# Altium PCB CM5IO_első terv.PcbDoc
Units mm, origin at the board's own origin, x right, y up, seen from the top; angles counter-clockwise.
Board outline 140 x 100 mm, 2 copper layers (F.Cu, B.Cu); 26 components, 347 nets, 730 pads, 4 vias.
Unrouted connection lines stored in the file: 306.
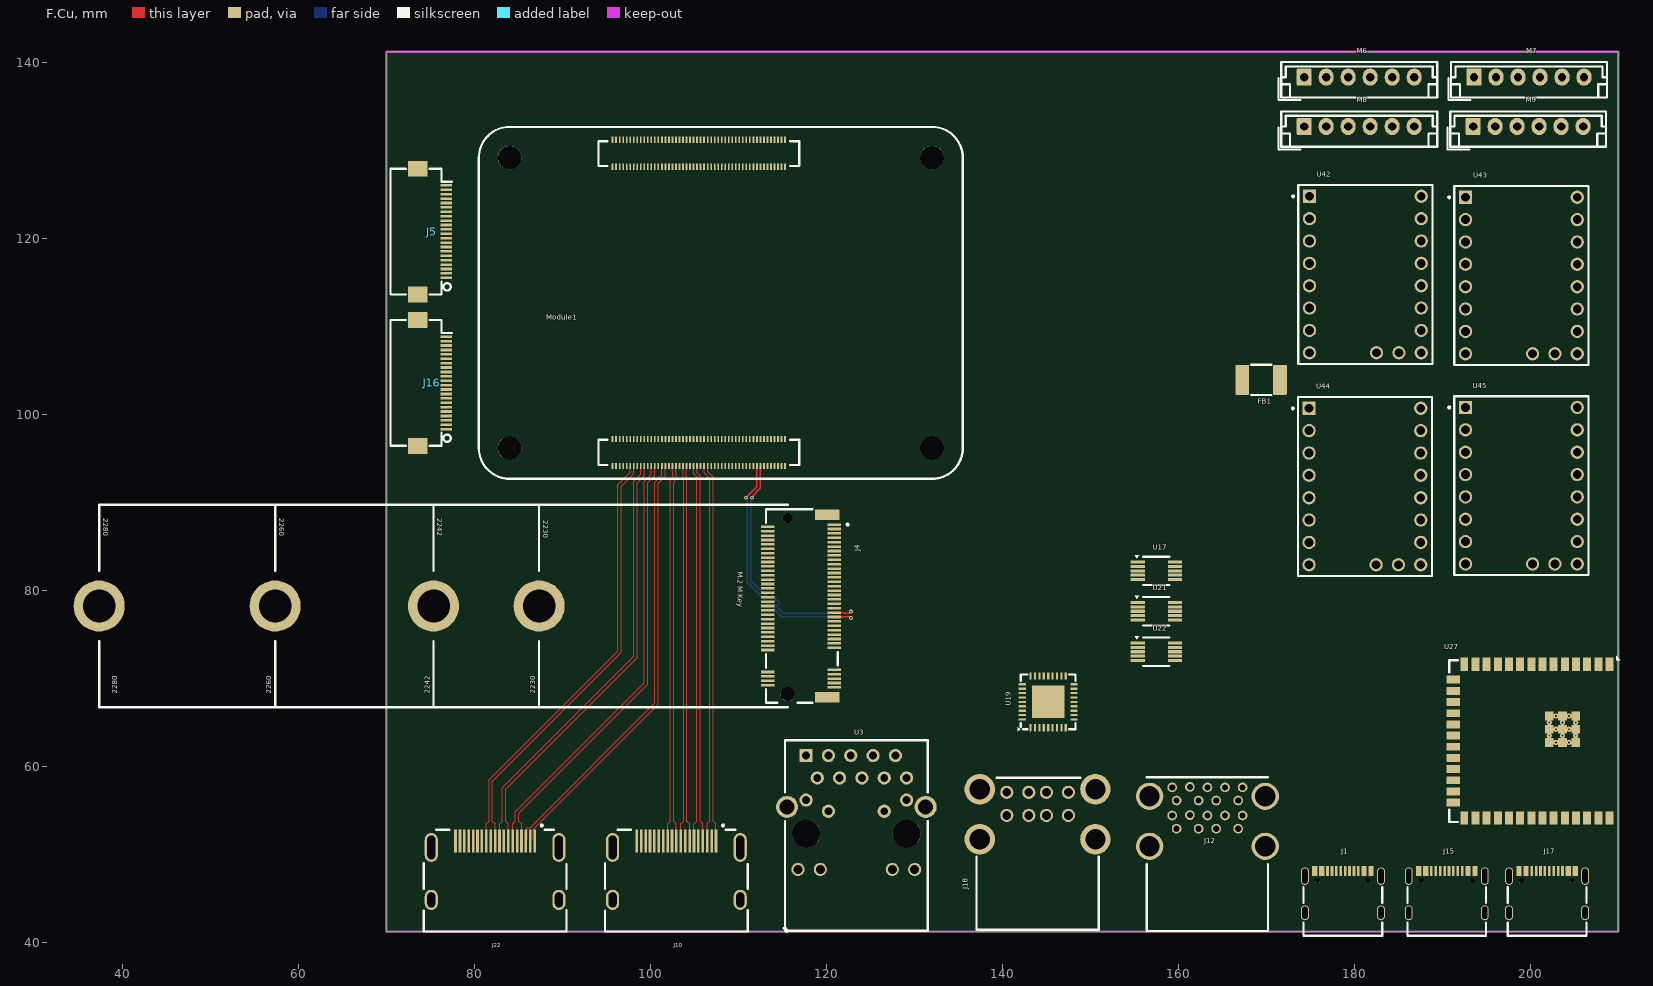
[diagram p0: F.Cu view]
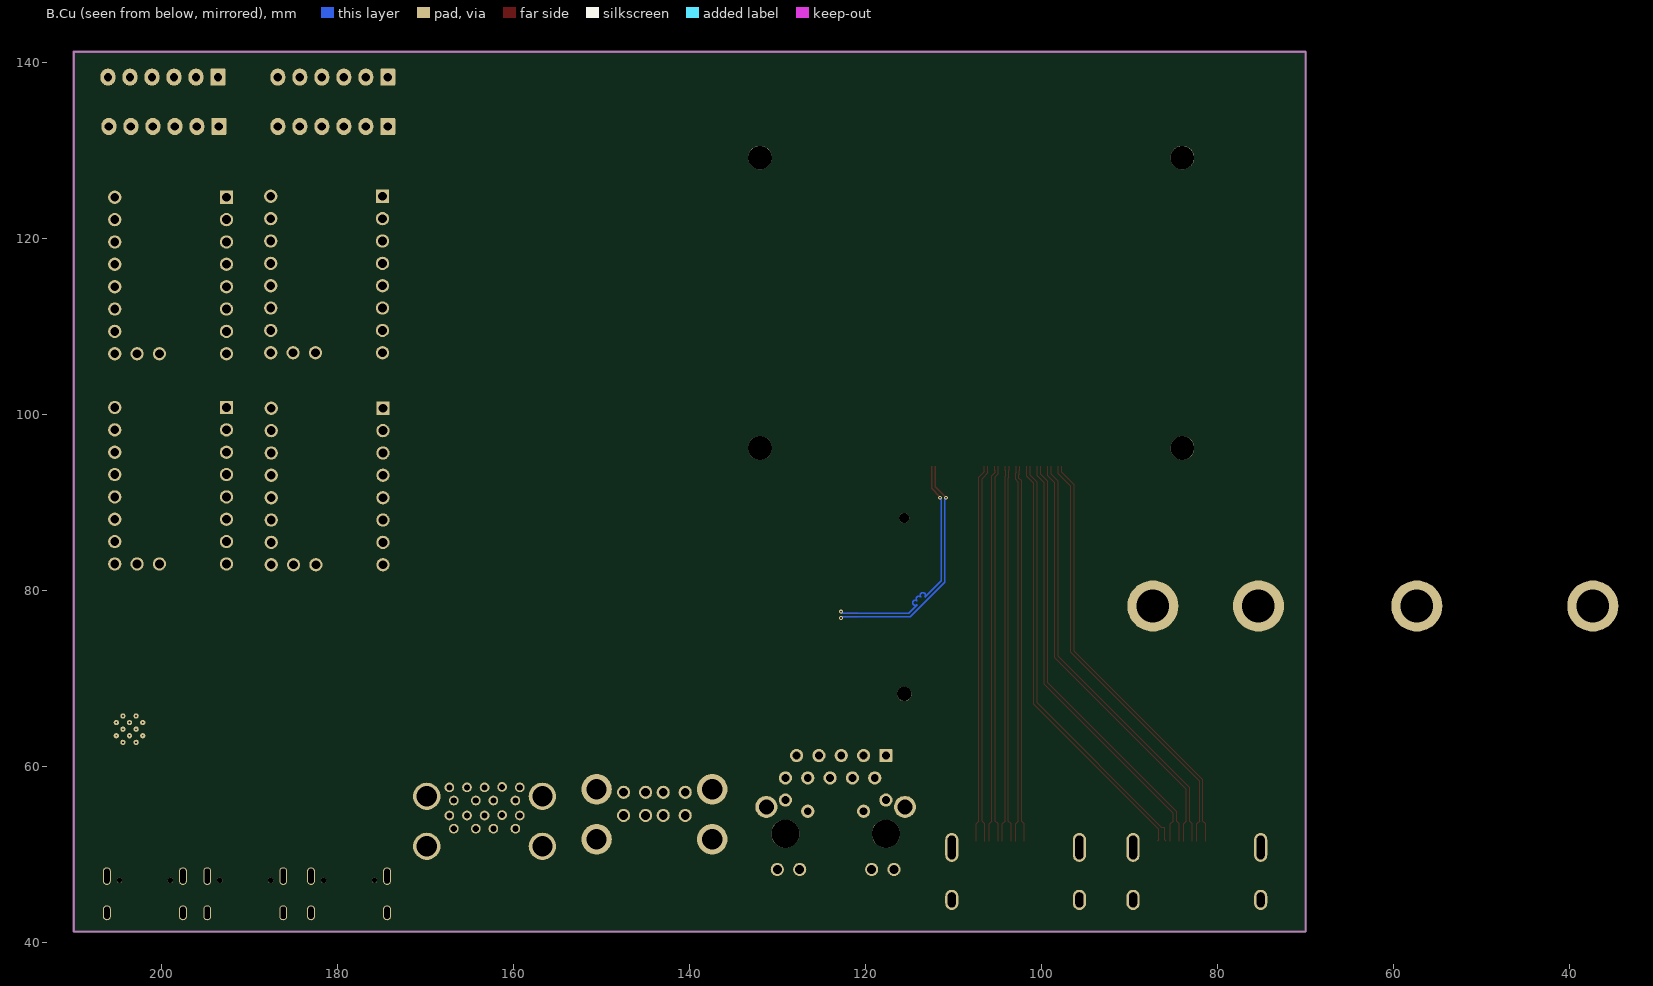
[diagram p1: B.Cu view, seen from below]

## Layer stack, top to bottom
F.Mask: solder mask 0.0102, Solder Resist, Dk 3.5
F.Cu: signal copper 0.0356
Dielectric 1: dielectric 0.32, FR-4, Dk 4.8
B.Cu: signal copper 0.0356
B.Mask: solder mask 0.0102, Solder Resist, Dk 3.5

## Board outline
70,141.25 70,41.25 210,41.25 210,141.25 70,141.25

## Design rules (kind name [scope] priority, off if disabled: settings)
Clearance "Clearence 1,7_PadClass" [InPadClass('Pad Class Clearance 1,7')] p1: gap=1.7 ignorepadtopadclearanceinfootprint=FALSE
MinimumSolderMaskSliver [All] p1: minsoldermaskwidth=0
PolygonConnect [All] p1: connectstyle=Direct reliefconductorwidth=0.254 reliefentries=4 polygonreliefangle="90 Angle" airgapwidth=0.254
RoutingVias [All] p1: holewidth=0.711 width=1.27 viastyle="Through Hole" minholewidth=0.711 minwidth=1.27 maxholewidth=0.711 maxwidth=1.27
SilkToSilkClearance [All] p1: silktosilkclearance=0
SilkToSolderMaskClearance [IsPad] p1: minsilkscreentomaskgap=0 clearancetoexposedcopper=TRUE
SolderMaskExpansion [All] p1: expansion=0.102 istentingtop=FALSE
Width [All] p1: maxlimit=10 minlimit=0.254 preferedwidth=0.254 minimp=50.000000 maximp=50.000000 favimp=50.000000
27 further rules are at their usual default settings.

## Classes and differential pairs
pad class "Pad Class Clearance 1,7": Module1-Un1 Module1-Un2 Module1-Un3 Module1-Un4

## Components (designator, comment, footprint, x,y, rotation, side; value= is the part's Value field where it differs from the comment)
FB1 "Comment" C_1812_4532Metric_Pad1.57x3.40mm_HandSolder 169.4,103.95 r180 top value="FerriteBead 742792093"
J1 "Comment" USB_C_Receptacle_Palconn_UTC16-G 178.7,45.625 r0 top value=USB_C_Receptacle_USB2.0_16P
J4 "Comment" "M.2 M Key socket" 115.6,78.25 r270 top value=Bus_M.2_Socket_M
J5 "Comment" Hirose_FH12-22S-0.5SH_1x22-1MP_P0.50mm_Horizontal 74.95,120.8 r270 top value=Conn_01x22_Female
J10 "Comment" "EDAC 690-019-298-412" 102.95,50.812 r0 top value=690-019-298-412
J12 "Comment" MTCONN_UBAF30-D2011 163.3,50.94 r0 top value=USB3_A
J15 "Comment" USB_C_Receptacle_Palconn_UTC16-G 190.5,45.625 r0 top value=USB_C_Receptacle_USB2.0_16P
J16 "Comment" Hirose_FH12-22S-0.5SH_1x22-1MP_P0.50mm_Horizontal 74.95,103.6 r270 top value=Conn_01x22_Female
J17 "Comment" USB_C_Receptacle_Palconn_UTC16-G 201.9,45.625 r0 top value=USB_C_Receptacle_USB2.0_16P
J18 "Comment" MOLEX_USB_67298-4090 144,51.743 r0 top value=690-008-221-904
J22 "Comment" "EDAC 690-019-298-412" 82.35,50.812 r0 top value=690-019-298-412
M6 "Comment" JST_EH_B6B-EH-A_1x06_P2.50mm_Vertical 174.3,138.35 r0 top value=Stepper_Motor_unipolar_6pin
M7 "Comment" JST_EH_B6B-EH-A_1x06_P2.50mm_Vertical 193.6,138.35 r0 top value=Stepper_Motor_unipolar_6pin
M8 "Comment" JST_EH_B6B-EH-A_1x06_P2.50mm_Vertical 174.3,132.75 r0 top value=Stepper_Motor_unipolar_6pin
M9 "Comment" JST_EH_B6B-EH-A_1x06_P2.50mm_Vertical 193.5,132.75 r0 top value=Stepper_Motor_unipolar_6pin
Module1 "Comment" Raspberry-Pi-5-Compute-Module 84,129.2 r270 top value=ComputeModule5-CM5
U3 "Comment" TRJG0926HENL 123.4,52.368 r0 top value=MagJack-A70-112-331N126
U17 "Comment" MSOP-10_3x3mm_P0.5mm 157.5,82.25 r0 top value=FSUSB42MUX
U19 "Comment" QFN-36-1EP_6x6mm_P0.5mm_EP3.7x3.7mm 145.2,67.35 r90 top value=USB2514B-I/M2
U21 "Comment" MSOP-10_3x3mm_P0.5mm 157.5,77.65 r0 top value=FSUSB42MUX
U22 "Comment" MSOP-10_3x3mm_P0.5mm 157.5,73.05 r0 top value=FSUSB42MUX
U27 "Comment" ESP32-S3-WROOM-2 203.74,62.89 r270 top value=ESP32-S3-WROOM-2
U42 "Comment" TMC2209 181.25,115.92 r0 top value=TMC2240_SILENTSTEPSTICK
U43 "Comment" TMC2209 198.98,115.81 r0 top value=TMC2240_SILENTSTEPSTICK
U44 "Comment" TMC2209 181.2,91.83 r0 top value=TMC2240_SILENTSTEPSTICK
U45 "Comment" TMC2209 198.98,91.92 r0 top value=TMC2240_SILENTSTEPSTICK

## Footprints (in the part's own frame and the unit in brackets; to place one, negate y for a bottom-side part, rotate by r counter-clockwise, add the part's x,y. Pads: shape width x height; smd on the part's side, far side on the other; paste and mask are expansions set on the pad)
C_1812_4532Metric_Pad1.57x3.40mm_HandSolder [mm]
  rrect16% 1.575x3.4 smd mask+0: 1(-2.137,0) 2(2.137,0)
  silkscreen extent -1.16,-1.71 1.16,1.71
"EDAC 690-019-298-412" [mm]
  rect 0.3x2.6 smd mask+0: 1(4.5,0.73) 2(4,0.73) 3(3.5,0.73) 4(3,0.73) 5(2.5,0.73) 6(2,0.73) 7(1.5,0.73) 8(1,0.73) 9(0.5,0.73) 10(0,0.73) 11(-0.5,0.73) 12(-1,0.73) 13(-1.5,0.73) 14(-2,0.73) 15(-2.5,0.73) 16(-3,0.73) 17(-3.5,0.73) 18(-4,0.73) 19(-4.5,0.73)
  rrect100% 1.5x3.3 hole 2.7 slot 0.9 at 0 deg paste-2539.97 mask+0: SH1(7.25,0) SH2(-7.25,0)
  rrect100% 1.5x2.3 hole 1.7 slot 0.9 at 0 deg paste-2539.97 mask+0: SH3(-7.25,-5.96) SH4(7.25,-5.96)
  silkscreen extent -8.1,-9.55 8.1,2.6
ESP32-S3-WROOM-2 [mm]
  rect 1.5x0.9 smd mask+0: 1(-8.75,5.26) 2(-8.75,3.99) 3(-8.75,2.72) 4(-8.75,1.45) 5(-8.75,0.18) 6(-8.75,-1.09) 7(-8.75,-2.36) 8(-8.75,-3.63) 9(-8.75,-4.9) 10(-8.75,-6.17) 11(-8.75,-7.44) 12(-8.75,-8.71) 13(-8.75,-9.98) 14(-8.75,-11.25) 27(8.75,-11.25) 28(8.75,-9.98) 29(8.75,-8.71) 30(8.75,-7.44) 31(8.75,-6.17) 32(8.75,-4.9) 33(8.75,-3.63) 34(8.75,-2.36) 35(8.75,-1.09) 36(8.75,0.18) 37(8.75,1.45) 38(8.75,2.72) 39(8.75,3.99) 40(8.75,5.26)
  rect 0.9x1.5 smd mask+0: 15(-6.985,-12.5) 16(-5.715,-12.5) 17(-4.445,-12.5) 18(-3.175,-12.5) 19(-1.905,-12.5) 20(-0.635,-12.5) 21(0.635,-12.5) 22(1.905,-12.5) 23(3.175,-12.5) 24(4.445,-12.5) 25(5.715,-12.5) 26(6.985,-12.5)
  rect 1x1 smd mask+0: 41(-2.86,1.41) 41(-2.86,-0.09) 41(-2.86,-1.59) 41(-1.36,1.41) 41(-1.36,-0.09) 41(-1.36,-1.59) 41(0.14,1.41) 41(0.14,-0.09) 41(0.14,-1.59)
  round 0.6 hole 0.2 paste-2539.97 mask+0: 41(-2.86,-0.84) 41(-2.86,0.66) 41(-2.11,1.41) 41(-2.11,-0.09) 41(-2.11,-1.59) 41(-1.36,0.66) 41(-1.36,-0.84) 41(-0.61,1.41) 41(-0.61,-0.09) 41(-0.61,-1.59) 41(0.14,0.66) 41(0.14,-0.84)
  silkscreen extent -9.7,-12.95 9.2,6.5
Hirose_FH12-22S-0.5SH_1x22-1MP_P0.50mm_Horizontal [mm]
  rect 0.3x1.3 smd mask+0: 1(5.25,1.85) 2(4.75,1.85) 3(4.25,1.85) 4(3.75,1.85) 5(3.25,1.85) 6(2.75,1.85) 7(2.25,1.85) 8(1.75,1.85) 9(1.25,1.85) 10(0.75,1.85) 11(0.25,1.85) 12(-0.25,1.85) 13(-0.75,1.85) 14(-1.25,1.85) 15(-1.75,1.85) 16(-2.25,1.85) 17(-2.75,1.85) 18(-3.25,1.85) 19(-3.75,1.85) 20(-4.25,1.85) 21(-4.75,1.85) 22(-5.25,1.85)
  rect 1.8x2.2 smd mask+0: MP(-7.15,-1.4) MP(7.15,-1.4)
  silkscreen extent -7.15,-4.5 7.15,2.5
JST_EH_B6B-EH-A_1x06_P2.50mm_Vertical [mm]
  rrect15% 1.7x1.95 hole 0.95 paste-2539.97 mask+0: 1(0,0)
  rrect100% 1.7x1.95 hole 0.95 paste-2539.97 mask+0: 2(2.5,0) 3(5,0) 4(7.5,0) 5(10,0) 6(12.5,0)
  silkscreen extent -2.91,-2.61 15.11,1.71
"M.2 M Key socket" [mm]
  rect 0.3x1.55 smd mask+0.102: 1(-9.25,5.275) 2(-9,-2.275) 3(-8.75,5.275) 4(-8.5,-2.275) 5(-8.25,5.275) 6(-8,-2.275) 7(-7.75,5.275) 8(-7.5,-2.275) 9(-7.25,5.275) 10(-7,-2.275) 11(-6.75,5.275) 12(-6.5,-2.275) 13(-6.25,5.275) 14(-6,-2.275) 15(-5.75,5.275) 16(-5.5,-2.275) 17(-5.25,5.275) 18(-5,-2.275) 19(-4.75,5.275) 20(-4.5,-2.275) 21(-4.25,5.275) 22(-4,-2.275) 23(-3.75,5.275) 24(-3.5,-2.275) 25(-3.25,5.275) 26(-3,-2.275) 27(-2.75,5.275) 28(-2.5,-2.275) 29(-2.25,5.275) 30(-2,-2.275) 31(-1.75,5.275) 32(-1.5,-2.275) 33(-1.25,5.275) 34(-1,-2.275) 35(-0.75,5.275) 36(-0.5,-2.275) 37(-0.25,5.275) 38(0,-2.275) 39(0.25,5.275) 40(0.5,-2.275) 41(0.75,5.275) 42(1,-2.275) 43(1.25,5.275) 44(1.5,-2.275) 45(1.75,5.275) 46(2,-2.275) 47(2.25,5.275) 48(2.5,-2.275) 49(2.75,5.275) 50(3,-2.275) 51(3.25,5.275) 52(3.5,-2.275) 53(3.75,5.275) 54(4,-2.275) 55(4.25,5.275) 56(4.5,-2.275) 57(4.75,5.275) 58(5,-2.275) 67(7.25,5.275) 68(7.5,-2.275) 69(7.75,5.275) 70(8,-2.275) 71(8.25,5.275) 72(8.5,-2.275) 73(8.75,5.275) 74(9,-2.275) 75(9.25,5.275)
  round 5.8 hole 3.7 paste-2539.97 mask+0.2: M1(0,-28.25) M2(0,-40.25) M3(0,-58.25) M4(0,-78.25)
  rect 1.2x2.75 smd mask+0.102: S1(-10.35,4.5) S2(10.35,4.5)
  round 1.15 hole 1.15 paste-2539.97 mask+0: Un1(-10,0)
  round 1.65 hole 1.65 paste-2539.97 mask+0: Un2(10,0)
  silkscreen extent -11.5,-78.25 11.5,6.9
MOLEX_USB_67298-4090 [mm]
  round 1.5 hole 1 paste-2539.97 mask+0: 1(-3.5,5.33) 2(-1,5.33) 3(1,5.33) 4(3.5,5.33) 5(-3.5,2.71) 6(-1,2.71) 7(1,2.71) 8(3.5,2.71)
  round 3.45 hole 2.3 paste-2539.97 mask+0: MT1(-6.57,0) MT2(6.57,0) MT3(-6.57,5.68) MT4(6.57,5.68)
  silkscreen extent -6.95,-10.29 6.95,7
MSOP-10_3x3mm_P0.5mm [mm]
  rrect25% 1.625x0.35 smd mask+0: 1(-2.113,1) 2(-2.113,0.5) 3(-2.113,0) 4(-2.113,-0.5) 5(-2.113,-1) 6(2.113,-1) 7(2.113,-0.5) 8(2.113,0) 9(2.113,0.5) 10(2.113,1)
  silkscreen extent -2.45,-1.61 1.5,1.77
MTCONN_UBAF30-D2011 [mm]
  round 3.1 hole 2.3 paste-2539.97 mask+0: 10(-6.57,0) 10(-6.57,5.68) 10(6.57,0) 10(6.57,5.68)
  round 1.1 hole 0.7 paste-2539.97 mask+0: A1(-3.5,2) A2(-1,2) A3(1,2) A4(3.5,2) A5(4,3.5) A6(2,3.5) A7(0,3.5) A8(-2,3.55) A9(-4,3.5) B1(-3.5,5.2) B2(-1,5.2) B3(1,5.2) B4(3.5,5.2) B5(4,6.7) B6(2,6.7) B7(0,6.7) B8(-2,6.75) B9(-4,6.7)
  silkscreen extent -6.89,-9.64 6.89,7.86
QFN-36-1EP_6x6mm_P0.5mm_EP3.7x3.7mm [mm]
  rrect25% 0.825x0.25 smd mask+0: 1(-2.937,2) 2(-2.937,1.5) 3(-2.937,1) 4(-2.937,0.5) 5(-2.937,0) 6(-2.937,-0.5) 7(-2.937,-1) 8(-2.937,-1.5) 9(-2.937,-2) 19(2.937,-2) 20(2.937,-1.5) 21(2.937,-1) 22(2.937,-0.5) 23(2.937,0) 24(2.937,0.5) 25(2.937,1) 26(2.937,1.5) 27(2.937,2)
  rrect25% 0.25x0.825 smd mask+0: 10(-2,-2.937) 11(-1.5,-2.937) 12(-1,-2.937) 13(-0.5,-2.937) 14(0,-2.937) 15(0.5,-2.937) 16(1,-2.937) 17(1.5,-2.937) 18(2,-2.937) 28(2,2.937) 29(1.5,2.937) 30(1,2.937) 31(0.5,2.937) 32(0,2.937) 33(-0.5,2.937) 34(-1,2.937) 35(-1.5,2.937) 36(-2,2.937)
  rect 3.7x3.7 smd paste-3.7 mask+0: 37(0,0)
  rrect25% 0.99x0.99 on Top Paste mask-0.99: Un1(-1.23,1.23) Un2(-1.23,0) Un3(-1.23,-1.23) Un4(0,1.23) Un5(0,0) Un6(0,-1.23) Un7(1.23,1.23) Un8(1.23,0) Un9(1.23,-1.23)
  silkscreen extent -3.35,-3.11 3.11,3.44
Raspberry-Pi-5-Compute-Module [mm]
  rect 0.7x0.2 smd mask+0: 1(-2.04,31.3) 2(1.04,31.3) 3(-2.04,30.9) 4(1.04,30.9) 5(-2.04,30.5) 6(1.04,30.5) 7(-2.04,30.1) 8(1.04,30.1) 9(-2.04,29.7) 10(1.04,29.7) 11(-2.04,29.3) 12(1.04,29.3) 13(-2.04,28.9) 14(1.04,28.9) 15(-2.04,28.5) 16(1.04,28.5) 17(-2.04,28.1) 18(1.04,28.1) 19(-2.04,27.7) 20(1.04,27.7) 21(-2.04,27.3) 22(1.04,27.3) 23(-2.04,26.9) 24(1.04,26.9) 25(-2.04,26.5) 26(1.04,26.5) 27(-2.04,26.1) 28(1.04,26.1) 29(-2.04,25.7) 30(1.04,25.7) 31(-2.04,25.3) 32(1.04,25.3) 33(-2.04,24.9) 34(1.04,24.9) 35(-2.04,24.5) 36(1.04,24.5) 37(-2.04,24.1) 38(1.04,24.1) 39(-2.04,23.7) 40(1.04,23.7) 41(-2.04,23.3) 42(1.04,23.3) 43(-2.04,22.9) 44(1.04,22.9) 45(-2.04,22.5) 46(1.04,22.5) 47(-2.04,22.1) 48(1.04,22.1) 49(-2.04,21.7) 50(1.04,21.7) 51(-2.04,21.3) 52(1.04,21.3) 53(-2.04,20.9) 54(1.04,20.9) 55(-2.04,20.5) 56(1.04,20.5) 57(-2.04,20.1) 58(1.04,20.1) 59(-2.04,19.7) 60(1.04,19.7) 61(-2.04,19.3) 62(1.04,19.3) 63(-2.04,18.9) 64(1.04,18.9) 65(-2.04,18.5) 66(1.04,18.5) 67(-2.04,18.1) 68(1.04,18.1) 69(-2.04,17.7) 70(1.04,17.7) 71(-2.04,17.3) 72(1.04,17.3) 73(-2.04,16.9) 74(1.04,16.9) 75(-2.04,16.5) 76(1.04,16.5) 77(-2.04,16.1) 78(1.04,16.1) 79(-2.04,15.7) 80(1.04,15.7) 81(-2.04,15.3) 82(1.04,15.3) 83(-2.04,14.9) 84(1.04,14.9) 85(-2.04,14.5) 86(1.04,14.5) 87(-2.04,14.1) 88(1.04,14.1) 89(-2.04,13.7) 90(1.04,13.7) 91(-2.04,13.3) 92(1.04,13.3) 93(-2.04,12.9) 94(1.04,12.9) 95(-2.04,12.5) 96(1.04,12.5) 97(-2.04,12.1) 98(1.04,12.1) 99(-2.04,11.7) 100(1.04,11.7) 101(31.96,31.3) 102(35.04,31.3) 103(31.96,30.9) 104(35.04,30.9) 105(31.96,30.5) 106(35.04,30.5) 107(31.96,30.1) 108(35.04,30.1) 109(31.96,29.7) 110(35.04,29.7) 111(31.96,29.3) 112(35.04,29.3) 113(31.96,28.9) 114(35.04,28.9) 115(31.96,28.5) 116(35.04,28.5) 117(31.96,28.1) 118(35.04,28.1) 119(31.96,27.7) 120(35.04,27.7) 121(31.96,27.3) 122(35.04,27.3) 123(31.96,26.9) 124(35.04,26.9) 125(31.96,26.5) 126(35.04,26.5) 127(31.96,26.1) 128(35.04,26.1) 129(31.96,25.7) 130(35.04,25.7) 131(31.96,25.3) 132(35.04,25.3) 133(31.96,24.9) 134(35.04,24.9) 135(31.96,24.5) 136(35.04,24.5) 137(31.96,24.1) 138(35.04,24.1) 139(31.96,23.7) 140(35.04,23.7) 141(31.96,23.3) 142(35.04,23.3) 143(31.96,22.9) 144(35.04,22.9) 145(31.96,22.5) 146(35.04,22.5) 147(31.96,22.1) 148(35.04,22.1) 149(31.96,21.7) 150(35.04,21.7) 151(31.96,21.3) 152(35.04,21.3) 153(31.96,20.9) 154(35.04,20.9) 155(31.96,20.5) 156(35.04,20.5) 157(31.96,20.1) 158(35.04,20.1) 159(31.96,19.7) 160(35.04,19.7) 161(31.96,19.3) 162(35.04,19.3) 163(31.96,18.9) 164(35.04,18.9) 165(31.96,18.5) 166(35.04,18.5) 167(31.96,18.1) 168(35.04,18.1) 169(31.96,17.7) 170(35.04,17.7) 171(31.96,17.3) 172(35.04,17.3) 173(31.96,16.9) 174(35.04,16.9) 175(31.96,16.5) 176(35.04,16.5) 177(31.96,16.1) 178(35.04,16.1) 179(31.96,15.7) 180(35.04,15.7) 181(31.96,15.3) 182(35.04,15.3) 183(31.96,14.9) 184(35.04,14.9) 185(31.96,14.5) 186(35.04,14.5) 187(31.96,14.1) 188(35.04,14.1) 189(31.96,13.7) 190(35.04,13.7) 191(31.96,13.3) 192(35.04,13.3) 193(31.96,12.9) 194(35.04,12.9) 195(31.96,12.5) 196(35.04,12.5) 197(31.96,12.1) 198(35.04,12.1) 199(31.96,11.7) 200(35.04,11.7)
  round 2.7 hole 2.7 paste-2539.97 mask+1.7: Un1(0,48) Un2(0,0) Un3(33,48) Un4(33,0)
  silkscreen extent -3.5,-3.5 36.5,51.5
TMC2209 [mm]
  rect 1.508x1.508 hole 1 paste-2539.97 mask+0.102: 1(-6.35,8.89)
  round 1.508 hole 1 paste-2539.97 mask+0.102: 2(-6.35,6.35) 3(-6.35,3.81) 4(-6.35,1.27) 5(-6.35,-1.27) 6(-6.35,-3.81) 7(-6.35,-6.35) 8(-6.35,-8.89) 9(6.35,8.89) 10(6.35,6.35) 11(6.35,3.81) 12(6.35,1.27) 13(6.35,-1.27) 14(6.35,-3.81) 15(6.35,-6.35) 16(6.35,-8.89) 17(1.27,-8.89) 18(3.81,-8.89)
  silkscreen extent -8.3,-10.16 7.62,10.16
TRJG0926HENL [mm]
  rrect17% 1.5x1.5 hole 0.9 paste-2539.97 mask+0: 1(-5.715,8.89)
  round 1.5 hole 0.9 paste-2539.97 mask+0: 2(-4.445,6.35) 3(-3.175,8.89) 4(-1.905,6.35) 5(-0.635,8.89) 6(0.635,6.35) 7(1.905,8.89) 8(3.175,6.35) 9(4.445,8.89) 10(5.715,6.35) 11(-5.715,3.83) 12(-3.175,2.56) 13(3.175,2.56) 14(5.715,3.83)
  round 1.5 hole 1.02 paste-2539.97 mask+0: 15(-6.63,-4.06) 16(-4.09,-4.06) 17(4.09,-4.06) 18(6.63,-4.06)
  round 2.5 hole 1.7 paste-2539.97 mask+0: 19(-7.875,3.05) 20(7.875,3.05)
  round 3.2 hole 3.2 paste-2539.97 mask+0: Un1(-5.715,0) Un2(5.715,0)
  silkscreen extent -8.25,-11.15 8.12,10.62
USB_C_Receptacle_Palconn_UTC16-G [mm]
  rect 0.6x1.16 smd mask+0: A1(-3.2,2.51) A4(-2.4,2.51) A9(2.4,2.51) A12(3.2,2.51) B1(3.2,2.51) B4(2.4,2.51) B9(-2.4,2.51) B12(-3.2,2.51)
  rect 0.3x1.16 smd mask+0: A5(-1.25,2.51) A6(-0.25,2.51) A7(0.25,2.51) A8(1.25,2.51) B5(1.75,2.51) B6(0.75,2.51) B7(-0.75,2.51) B8(-1.75,2.51)
  rrect100% 0.9x1.7 hole 0.6 slot 1.4 at 90 deg paste-2539.97 mask+0: S1(-4.32,-2.24) S1(4.32,-2.24)
  rrect100% 0.9x2 hole 0.6 slot 1.7 at 90 deg paste-2539.97 mask+0: S1(-4.32,1.93) S1(4.32,1.93)
  round 0.6 hole 0.6 paste-2539.97 mask+0: Un1(-2.89,1.45) Un2(2.89,1.45)
  silkscreen extent -4.47,-4.84 4.47,0.67

## Part data
FB1: library part C_1812_4532Metric_Pad1.57x3.40mm_HandSolder, "Capacitor SMD 1812 (4532 Metric), square (rectangular) end terminal, IPC_7351 nominal with elongated pad for handsoldering. (Body size source: IPC-SM-782 page 76, https://www.pcb-3d.com/wordpress/wp-content/uploads/ipc-sm-782a_amendment_1_and_2.pdf), generated with kicad-footprint-generator", Footprint=Capacitor_SMD:C_1812_4532Metric_Pad1.57x3.40mm_HandSolder, Description="Ferrite bead", ki_fp_filters="Inductor_* L_* *Ferrite*"
J1 J15 J17: library part USB_C_Receptacle_Palconn_UTC16-G, "http://www.palpilot.com/wp-content/uploads/2017/05/UTC027-GKN-OR-Rev-A.pdf", Footprint=Connector_USB:USB_C_Receptacle_Palconn_UTC16-G, Datasheet=https://www.usb.org/sites/default/files/documents/usb_type-c.zip, Description="USB 2.0-only 16P Type-C Receptacle connector", ki_fp_filters=USB*C*Receptacle*
J4: library part "M.2 M Key socket", Footprint="CM5IO:M.2 M Key socket", Description="M.2 Socket 3 Mechanical Key M", Field5=MTSSD03-67MSW337, Field6=MTSSD03-67MSW337, Field7=MTCONN, Part Description="M.2 M Key connector", ki_fp_filters=*M*2*M*
J5 J16: library part Hirose_FH12-22S-0.5SH_1x22-1MP_P0.50mm_Horizontal, "Molex FH12, FFC/FPC connector, FH12-22S-0.5SH, 22 Pins per row (https://www.hirose.com/product/en/products/FH12/FH12-24S-0.5SH(55)/), generated with kicad-footprint-generator", Footprint=CM5IO:Hirose_FH12-22S-0.5SH_1x22-1MP_P0.50mm_Horizontal, Datasheet=https://www.hirose.com/product/document?clcode=&productname=&series=FH12&documenttype=Catalog&lang=en&documentid=D31648_en, Field4=Mouser, Field5=798-FH12-22S-0.5SH55, Field6=FH12-22S-0.5SH55, Field7=Hirose, Part Description="22 Position FFC, FPC Connector Contacts, Bottom 0.020\" (0.50mm) Surface Mount, Right Angle", ki_fp_filters=Connector*:*_1x??_*
J10 J22: library part "EDAC 690-019-298-412", Footprint="CM5IO:EDAC 690-019-298-412", Datasheet=https://www.tme.eu/Document/f15dffbcfad8545e17826f72d36911c8/206A-SEAN-R03.pdf, Field4=Farnell, Field5=2614936, Field6=690-019-298-412, Field7=EDAC, Part Description="HDMI Connector, Right Angle, 19 Contacts, Receptacle, Surface Mount, Surface Mount Right Angle", Field8=UCON00802, ki_fp_filters=HDMI*A*
J12: library part MTCONN_UBAF30-D2011, "USB3 Stacked type A socket", Footprint=CM5IO:MTCONN_UBAF30-D2011, Field6=UBAF30-D2011, Field7=Mtconn, Field5=UBAF30-D2011, Part Description="Dual USB 3 connector"
J18: library part MOLEX_USB_67298-4090, Footprint=CM5IO:MOLEX_USB_67298-4090, Datasheet="Conn USB Type A RCP 4/4 POS Solder RA Thru-Hole 8 Terminal 2 Port Tray", Field4=Farnell, Field5=2751688, Field6=None, Field7=Molex, Field8=None, Part Description="USB-A (USB TYPE-A), Stacked Receptacle Connector 8 Position Through Hole, Right Angle"
M6 M7 M8 M9: library part JST_EH_B6B-EH-A_1x06_P2.50mm_Vertical, "JST EH series connector, B6B-EH-A (http://www.jst-mfg.com/product/pdf/eng/eEH.pdf), generated with kicad-footprint-generator", Footprint=Connector_JST:JST_EH_B6B-EH-A_1x06_P2.50mm_Vertical, Datasheet=http://www.infineon.com/dgdl/Application-Note-TLE8110EE_driving_UniPolarStepperMotor_V1.1.pdf?fileId=db3a30431be39b97011be5d0aa0a00b0, Description="6-wire unipolar stepper motor", ki_fp_filters="PinHeader*P2.54mm* TerminalBlock*"
Module1: library part Raspberry-Pi-5-Compute-Module, "Raspberry Pi 5 Compute Module", Footprint=CM5IO:Raspberry-Pi-5-Compute-Module, Description="RaspberryPi Compute module 5", Field4=Amphenol, Field5="2x 10164227-1001A1RLF", Field6="2x 10164227-1001A1RLF", Field7=Hirose, Part Description="100 Position Connector Receptacle, Center Strip Contacts Surface Mount Gold"
U3: library part TRJG0926HENL, "https://p.globalsources.com/IMAGES/PDT/SPEC/690/K1160305690.pdf", Footprint=CM5IO:TRJG0926HENL, Datasheet=https://p.globalsources.com/IMAGES/PDT/SPEC/690/K1160305690.pdf, Field6=TRJG0926HENL, Field7=Trxcon, Field8=UCON00900, Part Description="Gigabit Ethernet Magjack", Field5=TRJG0926HENL
U17 U21 U22: library part MSOP-10_3x3mm_P0.5mm, "MSOP, 10 Pin (https://www.jedec.org/system/files/docs/mo-187F.pdf variant BA), generated with kicad-footprint-generator ipc_gullwing_generator.py", Footprint=Package_SO:MSOP-10_3x3mm_P0.5mm, Datasheet=https://www.onsemi.com/pub/Collateral/FSUSB42-D.PDF, Field4=Farnell, Field5=2564479, Field6=FSUSB42MUX, Field7=Onsemi, Part Description="USB Switch IC 1 Channel 10-MSOP"
U19: library part QFN-36-1EP_6x6mm_P0.5mm_EP3.7x3.7mm, "QFN, 36 Pin (http://ww1.microchip.com/downloads/en/DeviceDoc/36L_QFN_6x6_with_3_7x3_7_EP_Punch_Dimpled_4E_C04-0241A.pdf), generated with kicad-footprint-generator ipc_noLead_generator.py", Footprint=Package_DFN_QFN:QFN-36-1EP_6x6mm_P0.5mm_EP3.7x3.7mm, Datasheet=http://ww1.microchip.com/downloads/en/DeviceDoc/00001692C.pdf, Description="USB 2.0 Hi-Speed Hub Controller", Field4=Farnell, Field5=2775060, Field6=USB2514B-I/M2, Field7=Microchip, Part Description="USB Hub Controller USB Interface 36-SQFN (6x6)", Field8=UICC00931, ki_fp_filters=QFN*6x6mm*P0.5mm*
U27: library part ESP32-S3-WROOM-2, "2.4 GHz Wi­-Fi and Bluetooth 5 (LE) module: https://www.espressif.com/sites/default/files/documentation/esp32-s3-wroom-2_datasheet_en.pdf", Footprint=RF_Module:ESP32-S3-WROOM-2, Datasheet=https://www.espressif.com/sites/default/files/documentation/esp32-s3-wroom-2_datasheet_en.pdf, Description="RF Module, 2.4 GHz, Wi­-Fi, Bluetooth, BLE, ESP32­-S3R8V", ki_fp_filters=ESP32?S3?WROOM?2*
U42 U43 U44 U45: library part TMC2209, Package=None, MANUFACTURER="Trinamic Motion Control GmbH", Footprint=CM5IO:TMC2209, MF="Trinamic Motion Control GmbH", Description_1="\n                        \n                            TMC2209 Motor Controller/Driver Power Management Evaluation Board\n                        \n", Price=None, Check_prices=https://www.snapeda.com/parts/TMC2209%20SILENTSTEPSTICK/Trinamic/view-part/?ref=eda, STANDARD="Manufacturer Recommendations", PARTREV=1.20, SnapEDA_Link=https://www.snapeda.com/parts/TMC2209%20SILENTSTEPSTICK/Trinamic/view-part/?ref=snap, MP="TMC2209 SILENTSTEPSTICK", Availability="In Stock", SNAPEDA_PN="TMC2209 SILENTSTEPSTICK"

## Via types
v1: diameter 0.45, hole 0.2, F.Cu to B.Cu, tented both sides, 4 vias

## Nets (pads, with @x,y where several pads share a name; then routed paths per layer and width w, separated by ;. In a path a pad name is that pad's centre, name@x,y a point inside that pad or via, vN(x,y) a via of type N, cw(c..) or ccw(c..) an arc to the next point about the centre after c; other vN are vias at no path point)
3v3-input: U27.2
+1.8v: Module1.88 Module1.90
+3.3v_DSI: J5.22 J16.22
+5v: Module1.77 Module1.79 Module1.81 Module1.83 Module1.85 Module1.87
/+3.3v: Module1.84 Module1.86 U3.15 U3.17
/CM5_HighSpeed/VBUS: J12.A1 J12.B1
/USB2-HUB/+3.3v: U17.1 U19.5 U19.10 U19.15 U19.23 U19.27 U19.29 U19.36 U21.1 U22.1
/USB2-HUB/VBUS: J18.1 J18.5
BT_nDis: Module1.91
CAM_GPIO0: J5.17 Module1.97
CAM_GPIO1: J5.18 Module1.100
CC1: Module1.94
CC2: Module1.96
CH343P_usbD+: U22.3
CH343P_usbD-: U22.4
DPHY0_C_N: J5.8 Module1.127
DPHY0_C_P: J5.9 Module1.129
DPHY0_D0_N: J5.2 Module1.115
DPHY0_D0_P: J5.3 Module1.117
DPHY0_D1_N: J5.5 Module1.121
DPHY0_D1_P: J5.6 Module1.123
DPHY0_D2_N: J5.11 Module1.133
DPHY0_D2_P: J5.12 Module1.135
DPHY0_D3_N: J5.14 Module1.139
DPHY0_D3_P: J5.15 Module1.141
DPHY1_C_N: J16.8 Module1.187
DPHY1_C_P: J16.9 Module1.189
DPHY1_D0_N: J16.2 Module1.175
DPHY1_D0_P: J16.3 Module1.177
DPHY1_D1_N: J16.5 Module1.181
DPHY1_D1_P: J16.6 Module1.183
DPHY1_D2_N: J16.11 Module1.193
DPHY1_D2_P: J16.12 Module1.195
DPHY1_D3_N: J16.14 Module1.194
DPHY1_D3_P: J16.15 Module1.196
EEPROM_nWP: Module1.20
esp32_chip_pu: U27.3
esp32_gpio0: U27.27
esp_rxd0: U27.36
esp_txd0: U27.37
ESP_usbD+: U21.3 U27.14
ESP_usbD-: U21.4 U27.13
ETH_LEDG: Module1.17
ETH_LEDY: Module1.15
GND: FB1.2 J1.A1 J1.A12 J1.B1 J1.B12 J1.S1 J4.1 J4.3 J4.9 J4.15 J4.21 J4.27 J4.33 J4.39 J4.45 J4.51 J4.57 J4.71 J4.73 J4.75 J4.M1 J4.M2 J4.M3 J4.M4 J4.S1 J4.S2 J5.1 J5.4 J5.7 J5.10 J5.13 J5.16 J5.19 J10.2 J10.5 J10.8 J10.11 J10.17 J10.SH1 J10.SH2 J10.SH3 J10.SH4 J12.10 J12.A4 J12.A7 J12.B4 J12.B7 J15.A1 J15.A12 J15.B1 J15.B12 J15.S1 J16.1 J16.4 J16.7 J16.10 J16.13 J16.16 J16.19 J17.A1 J17.A12 J17.B1 J17.B12 J17.S1 J18.4 J18.8 J18.MT1 J18.MT2 J18.MT3 J18.MT4 J22.2 J22.5 J22.8 J22.11 J22.17 J22.SH1 J22.SH2 J22.SH3 J22.SH4 Module1.1 Module1.2 Module1.7 Module1.8 Module1.13 Module1.14 Module1.22 Module1.23 Module1.32 Module1.33 Module1.42 Module1.43 Module1.52 Module1.53 Module1.59 Module1.60 Module1.65 Module1.66 Module1.71 Module1.74 Module1.98 Module1.107 Module1.108 Module1.113 Module1.114 Module1.119 Module1.120 Module1.125 Module1.126 Module1.131 Module1.132 Module1.137 Module1.138 Module1.144 Module1.150 Module1.155 Module1.156 Module1.161 Module1.162 Module1.167 Module1.168 Module1.173 Module1.174 Module1.179 Module1.180 Module1.185 Module1.186 Module1.191 Module1.192 Module1.197 Module1.198 U3.19 U3.20 U17.5 U17.10 U19.37 U21.5 U21.10 U22.5 U22.10 U27.1 U27.40 U27.41
GPIO2: Module1.58
GPIO3: Module1.56
GPIO4: Module1.54
GPIO5: Module1.34
GPIO6: Module1.30
GPIO7: Module1.37
GPIO8: Module1.39
GPIO9: Module1.40
GPIO10: Module1.44
GPIO11: Module1.38
GPIO12: Module1.31
GPIO13: Module1.28
GPIO14: Module1.55
GPIO15: Module1.51
GPIO16: Module1.29
GPIO17: Module1.50
GPIO18: Module1.49
GPIO19: Module1.26
GPIO20: Module1.27
GPIO21: Module1.25
GPIO22: Module1.46
GPIO23: Module1.47
GPIO24: Module1.45
GPIO25: Module1.41
GPIO26: Module1.24
GPIO27: Module1.48
GPIO48_RGB: U27.25
GPIO_VREF: Module1.78
HD1_N: J18.2 U19.1
HD1_P: J18.3 U19.2
HD2_N: J18.6 U19.3
HD2_P: J18.7 U19.4
HD3_N: U19.6 U22.6
HD3_P: U19.7 U22.7
HD4_N: U19.8 U21.6
HD4_P: U19.9 U21.7
HDMI0_CEC: J22.13 Module1.151
HDMI0_CK_N: J22.12 Module1.190 | length 49.4
  F.Cu w0.127: J22.12 81.35,53.493 81.66,53.803 81.66,58.479 96.31,73.129 96.31,92.029 97.71,93.429 97.71,93.625 97.7,93.635 Module1.190
HDMI0_CK_P: J22.10 Module1.188 | length 49.4
  F.Cu w0.127: J22.10 82.35,53.493 82.04,53.803 82.04,58.321 96.69,72.971 96.69,84.763 96.69,84.889 96.69,91.871 98.09,93.271 98.09,93.625 98.1,93.635 Module1.188
HDMI0_D0_N: J22.9 Module1.184 | length 49.3
  F.Cu w0.127: J22.9 82.85,53.493 83.16,53.803 83.16,57.579 98.11,72.529 98.11,92.429 98.91,93.229 98.91,93.625 98.9,93.635 Module1.184
HDMI0_D0_P: J22.7 Module1.182 | length 49.3
  F.Cu w0.127: J22.7 83.85,53.493 83.54,53.803 83.54,57.421 98.49,72.371 98.49,92.271 99.29,93.071 99.29,93.625 99.3,93.635 Module1.182
HDMI0_D1_N: J22.6 Module1.178 | length 49.1
  F.Cu w0.127: J22.6 84.35,53.493 84.66,53.803 84.66,54.879 99.31,69.529 99.31,92.429 100.11,93.229 100.11,93.625 100.1,93.635 Module1.178
HDMI0_D1_P: J22.4 Module1.176 | length 49.1
  F.Cu w0.127: J22.4 85.35,53.493 85.04,53.803 85.04,54.721 99.69,69.371 99.69,92.271 100.49,93.071 100.49,93.625 100.5,93.635 Module1.176
HDMI0_D2_N: J22.3 Module1.172 | length 49.2
  F.Cu w0.127: J22.3 86.007,51.699 86.007,53.036 86.317,53.036 100.51,67.229 100.51,92.329 101.31,93.129 101.31,93.625 101.3,93.635 Module1.172
HDMI0_D2_P: J22.1 Module1.170 | length 48.9
  F.Cu w0.127: J22.1 86.693,51.699 86.693,52.875 100.89,67.071 100.89,92.171 101.69,92.971 101.69,93.625 101.7,93.635 Module1.170
HDMI0_HOTPLUG: J22.19 Module1.153
HDMI0_SCL: J22.15 Module1.200
HDMI0_SDA: J22.16 Module1.199
HDMI1_CEC: J10.13 Module1.149
HDMI1_CK_N: J10.12 Module1.166 | length 42.9
  F.Cu w0.127: J10.12 101.95,53.493 102.26,53.803 102.26,92.479 102.577,92.796 102.577,93.183 102.51,93.251 102.51,93.625 102.5,93.635 Module1.166
HDMI1_CK_P: J10.10 Module1.164 | length 42.9
  F.Cu w0.127: Module1.164 102.9,93.635 102.89,93.625 102.89,93.402 102.957,93.335 102.957,92.639 102.64,92.321 102.64,53.803 102.95,53.493 J10.10
HDMI1_D0_N: J10.9 Module1.160 | length 42.8
  F.Cu w0.127: J10.9 103.45,53.493 103.76,53.803 103.76,92.85 103.71,92.9 103.71,93.625 103.7,93.635 Module1.160
HDMI1_D0_P: J10.7 Module1.158 | length 42.8
  F.Cu w0.127: Module1.158 104.1,93.635 104.09,93.625 104.09,93.045 104.14,92.995 104.14,53.803 104.45,53.493 J10.7
HDMI1_D1_N: J10.6 Module1.154 | length 42.9
  F.Cu w0.127: Module1.154 104.9,93.635 104.91,93.625 104.91,93.271 105.26,92.921 105.26,53.803 104.95,53.493 J10.6
HDMI1_D1_P: J10.4 Module1.152 | length 42.9
  F.Cu w0.127: Module1.152 105.3,93.635 105.29,93.625 105.29,93.429 105.64,93.079 105.64,53.803 105.95,53.493 J10.4
HDMI1_D2_N: J10.3 Module1.148 | length 43
  F.Cu w0.127: Module1.148 106.1,93.635 106.11,93.625 106.11,93.371 106.76,92.721 106.76,53.803 106.45,53.493 J10.3
HDMI1_D2_P: J10.1 Module1.146 | length 43
  F.Cu w0.127: Module1.146 106.5,93.635 106.49,93.625 106.49,93.529 107.14,92.879 107.14,53.803 107.45,53.493 J10.1
HDMI1_HOTPLUG: J10.19 Module1.143
HDMI1_SCL: J10.15 Module1.147
HDMI1_SDA: J10.16 Module1.145
HDMI_5v: J10.18 J22.18
ID_SC: Module1.35
ID_SD: Module1.36
M1_CS: U42.13
M1_DIR: U42.9
M1_EN: U42.16
M1_STEP: U42.10
M2_3v3: J4.2 J4.4 J4.12 J4.14 J4.16 J4.18 J4.70 J4.72 J4.74
M2_CS: U44.13
M2_DIR: U44.9
M2_EN: U44.16
M2_STEP: U44.10
M3_CS: U43.13
M3_DIR: U43.9
M3_EN: U43.16
M3_STEP: U43.10
M4_CS: U45.13
M4_DIR: U45.9
M4_EN: U45.16
M4_STEP: U45.10
"Motor 1 power": U42.8
"Motor 2 power": U44.8
"Motor 3 power": U43.8
"Motor 4 power": U45.8
Net-(C1-Pad1): U3.4 U3.5
Net-(D8-K): U42.17
Net-(D9-K): U43.17
Net-(D10-K): U44.17
Net-(D11-K): U45.17
Net-(J4-DAS{slash}{\D\S\S\}\{\s\l\a\s\h\}\{LED1}): J4.10
Net-(J4-SUSCLK): J4.68
Net-(J15-CC1): J15.A5
Net-(J15-CC2): J15.B5
Net-(J15-VBUS-PadA4): J15.A4 J15.A9 J15.B4 J15.B9
Net-(J16-Pin_17): J16.17
Net-(J17-CC1): J17.A5
Net-(J17-CC2): J17.B5
Net-(J17-VBUS-PadA4): J17.A4 J17.A9 J17.B4 J17.B9
Net-(M6--): M6.3 U42.3
Net-(M7--): M7.3 U43.3
Net-(M8--): M8.3 U44.3
Net-(M9--): M9.3 U45.3
Net-(Module1A-LED_nACT): Module1.21
Net-(U3-LEDG_K): U3.18
Net-(U3-LEDY_K): U3.16
Net-(U19-HS_IND{slash}CFG_SEL1): U19.25
Net-(U19-RBIAS): U19.35
Net-(U19-RESET_N): U19.26
Net-(U19-SCL{slash}SMBCLK{slash}CFG_SEL0): U19.24
Net-(U19-SDA{slash}SMBDATA{slash}NON_REM1): U19.22
Net-(U19-SUSP_IND{slash}LOCAL_PWR{slash}NON_REM0): U19.28
Net-(U19-XTALIN{slash}CLKIN): U19.33
Net-(U19-XTALOUT): U19.32
Net-(U21-HSD1_M): J15.A7 J15.B7 U21.8
Net-(U21-HSD1_P): J15.A6 J15.B6 U21.9
Net-(U21-SEL): U21.2
Net-(U22-HSD1_M): J17.A7 J17.B7 U22.8
Net-(U22-HSD1_P): J17.A6 J17.B6 U22.9
Net-(U22-SEL): U22.2
Net-(U42-M1A): M6.6 U42.6
Net-(U42-M2A): M6.4 U42.5
Net-(U42-M2B): M6.1 U42.4
Net-(U43-M1A): M7.6 U43.6
Net-(U43-M2A): M7.4 U43.5
Net-(U43-M2B): M7.1 U43.4
Net-(U44-M1A): M8.6 U44.6
Net-(U44-M2A): M8.4 U44.5
Net-(U44-M2B): M8.1 U44.4
Net-(U45-M1A): M9.6 U45.6
Net-(U45-M2A): M9.4 U45.5
Net-(U45-M2B): M9.1 U45.4
nEXTRST: J1.A4 J1.A9 J1.B4 J1.B9
nOCS1: U19.13 U19.17 U19.19 U19.21
nPWR_LED: Module1.95
nRPIBOOT: Module1.93
PCIE_CLK_N: J4.53 Module1.112
PCIE_CLK_P: J4.55 Module1.110
PCIE_nCLKREQ: J4.52 Module1.102
PCIE_nRST: J4.50 Module1.109
PCIE_nWAKE: J4.54 Module1.104
PCIE_PWR_EN: Module1.106
PCIE_RX_N: J4.43 Module1.118 | length 29.3
  F.Cu w0.147: v1(110.849,90.55) 112.1,91.802 Module1.118 ; J4.43 122.038,77 122.088,77.05 122.648,77.05 v1(122.8,76.898)
  B.Cu w0.147: v1(110.849,90.55) 111,90.398 111,80.967 114.917,77.05 122.648,77.05 v1(122.8,76.898)
PCIE_RX_P: J4.41 Module1.116 | length 31.2
  F.Cu w0.147: v1(111.551,90.55) 111.551,90.687 112.5,91.636 Module1.116 ; J4.41 122.038,77.5 122.088,77.45 122.648,77.45 v1(122.8,77.602)
  B.Cu w0.147: v1(111.551,90.55) 111.4,90.398 111.4,81.133 113.28,79.253 cw(c113.492,79.465) 113.704,79.253 113.741,79.29 cw(c113.953,79.077) 114.165,79.29 cw(c113.953,79.077) 114.165,78.865 114.128,78.829 cw(c114.34,78.617) 114.128,78.405 114.246,78.287 115.083,77.45 122.648,77.45 v1(122.8,77.602)
PCIE_TX_N: J4.49 Module1.124
PCIE_TX_P: J4.47 Module1.122
PMIC_ENABLE: Module1.99
PWM: Module1.19
PWR1: U19.12
PWR_BUT: Module1.92
PWR_CC1: J1.A5
PWR_CC2: J1.B5
SCL0: J5.20 Module1.80
SCL1: J16.20
SD_CLK: Module1.57
SD_CMD: Module1.62
SD_DAT0: Module1.63
SD_DAT1: Module1.67
SD_DAT2: Module1.69
SD_DAT3: Module1.61
SD_PWR_ON: Module1.75
SDA0: J5.21 Module1.82
SDA1: J16.21
SYNC_OUT: Module1.18
TACHO: Module1.16
TMC_GND: FB1.1 U42.1 U42.7 U43.1 U43.7 U44.1 U44.7 U45.1 U45.7
TMC_MISO: U42.11 U43.11 U44.11 U45.11
TMC_MOSI: U42.15 U43.15 U44.15 U45.15
TMC_SPI_CLK: U42.14 U43.14 U44.14 U45.14
TMC_VIO: U42.2 U43.2 U44.2 U45.2
TR0_TAP: U3.11
TR1_TAP: U3.12
TR2_TAP: U3.13
TR3_TAP: U3.14
TRD0_N: Module1.10 U3.2
TRD0_P: Module1.12 U3.1
TRD1_N: Module1.6 U3.6
TRD1_P: Module1.4 U3.3
TRD2_N: Module1.9 U3.8
TRD2_P: Module1.11 U3.7
TRD3_N: Module1.5 U3.10
TRD3_P: Module1.3 U3.9
unconnected-(J1-SBU1-PadA8): J1.A8
unconnected-(J1-SBU2-PadB8): J1.B8
unconnected-(J4-DEVSLP-Pad38): J4.38
unconnected-(J4-NC-Pad6): J4.6
unconnected-(J4-NC-Pad8): J4.8
unconnected-(J4-NC-Pad20): J4.20
unconnected-(J4-NC-Pad22): J4.22
unconnected-(J4-NC-Pad24): J4.24
unconnected-(J4-NC-Pad26): J4.26
unconnected-(J4-NC-Pad28): J4.28
unconnected-(J4-NC-Pad30): J4.30
unconnected-(J4-NC-Pad32): J4.32
unconnected-(J4-NC-Pad34): J4.34
unconnected-(J4-NC-Pad36): J4.36
unconnected-(J4-NC-Pad40): J4.40
unconnected-(J4-NC-Pad42): J4.42
unconnected-(J4-NC-Pad44): J4.44
unconnected-(J4-NC-Pad46): J4.46
unconnected-(J4-NC-Pad48): J4.48
unconnected-(J4-NC-Pad56): J4.56
unconnected-(J4-NC-Pad58): J4.58
unconnected-(J4-NC-Pad67): J4.67
unconnected-(J4-PEDET-Pad69): J4.69
unconnected-(J4-PERn1-Pad35): J4.35
unconnected-(J4-PERn2-Pad23): J4.23
unconnected-(J4-PERn3-Pad11): J4.11
unconnected-(J4-PERp1-Pad37): J4.37
unconnected-(J4-PERp2-Pad25): J4.25
unconnected-(J4-PERp3-Pad13): J4.13
unconnected-(J4-PETn1-Pad29): J4.29
unconnected-(J4-PETn2-Pad17): J4.17
unconnected-(J4-PETn3-Pad5): J4.5
unconnected-(J4-PETp1-Pad31): J4.31
unconnected-(J4-PETp2-Pad19): J4.19
unconnected-(J4-PETp3-Pad7): J4.7
unconnected-(J10-UTILITY{slash}HEAC+-Pad14): J10.14
unconnected-(J15-SBU1-PadA8): J15.A8
unconnected-(J15-SBU2-PadB8): J15.B8
unconnected-(J16-Pin_18-Pad18): J16.18
unconnected-(J17-SBU1-PadA8): J17.A8
unconnected-(J17-SBU2-PadB8): J17.B8
unconnected-(J22-UTILITY{slash}HEAC+-Pad14): J22.14
unconnected-(M6-Pad2): M6.2
unconnected-(M6-Pad5): M6.5
unconnected-(M7-Pad2): M7.2
unconnected-(M7-Pad5): M7.5
unconnected-(M8-Pad2): M8.2
unconnected-(M8-Pad5): M8.5
unconnected-(M9-Pad2): M9.2
unconnected-(M9-Pad5): M9.5
unconnected-(Module1A-SD_DAT4-Pad68): Module1.68
unconnected-(Module1A-SD_DAT5-Pad64): Module1.64
unconnected-(Module1A-SD_DAT6-Pad72): Module1.72
unconnected-(Module1A-SD_DAT7-Pad70): Module1.70
unconnected-(Module1A-SD_VDD_Override-Pad73): Module1.73
unconnected-(U19-CRFILT-Pad14): U19.14
unconnected-(U19-PLLFILT-Pad34): U19.34
unconnected-(U19-PRTPWR2{slash}BC_EN2-Pad16): U19.16
unconnected-(U19-PRTPWR3{slash}BC_EN3-Pad18): U19.18
unconnected-(U19-PRTPWR4{slash}BC_EN4-Pad20): U19.20
unconnected-(U19-TEST-Pad11): U19.11
unconnected-(U27-IO1-Pad39): U27.39
unconnected-(U27-IO2-Pad38): U27.38
unconnected-(U27-IO3-Pad15): U27.15
unconnected-(U27-IO4-Pad4): U27.4
unconnected-(U27-IO5-Pad5): U27.5
unconnected-(U27-IO6-Pad6): U27.6
unconnected-(U27-IO7-Pad7): U27.7
unconnected-(U27-IO8-Pad12): U27.12
unconnected-(U27-IO9-Pad17): U27.17
unconnected-(U27-IO10-Pad18): U27.18
unconnected-(U27-IO11-Pad19): U27.19
unconnected-(U27-IO12-Pad20): U27.20
unconnected-(U27-IO13-Pad21): U27.21
unconnected-(U27-IO14-Pad22): U27.22
unconnected-(U27-IO15-Pad8): U27.8
unconnected-(U27-IO16-Pad9): U27.9
unconnected-(U27-IO17-Pad10): U27.10
unconnected-(U27-IO18-Pad11): U27.11
unconnected-(U27-IO21-Pad23): U27.23
unconnected-(U27-IO38-Pad31): U27.31
unconnected-(U27-IO45-Pad26): U27.26
unconnected-(U27-IO46-Pad16): U27.16
unconnected-(U27-IO47-Pad24): U27.24
unconnected-(U27-MTCK{slash}IO39-Pad32): U27.32
unconnected-(U27-MTDI{slash}IO41-Pad34): U27.34
unconnected-(U27-MTDO{slash}IO40-Pad33): U27.33
unconnected-(U27-MTMS{slash}IO42-Pad35): U27.35
unconnected-(U27-NC-Pad28): U27.28
unconnected-(U27-NC-Pad29): U27.29
unconnected-(U27-NC-Pad30): U27.30
unconnected-(U42-AIN-Pad18): U42.18
unconnected-(U42-CLK-Pad12): U42.12
unconnected-(U43-AIN-Pad18): U43.18
unconnected-(U43-CLK-Pad12): U43.12
unconnected-(U44-AIN-Pad18): U44.18
unconnected-(U44-CLK-Pad12): U44.12
unconnected-(U45-AIN-Pad18): U45.18
unconnected-(U45-CLK-Pad12): U45.12
USB2_N: Module1.103 U17.4
USB2_P: Module1.105 U17.3
USB3-0-D_N: J12.A2 Module1.136
USB3-0-D_P: J12.A3 Module1.134
USB3-0-RX_N: J12.A6 Module1.128
USB3-0-RX_P: J12.A5 Module1.130
USB3-0-TX_N: J12.A9 Module1.140
USB3-0-TX_P: J12.A8 Module1.142
USB3-1-D_N: J12.B2 Module1.165
USB3-1-D_P: J12.B3 Module1.163
USB3-1-RX_N: J12.B6 Module1.157
USB3-1-RX_P: J12.B5 Module1.159
USB3-1-TX_N: J12.B9 Module1.169
USB3-1-TX_P: J12.B8 Module1.171
USBD_N: J1.A6 J1.B6 U17.8
USBD_P: J1.A7 J1.B7 U17.9
USBH_N: U17.6 U19.30
USBH_P: U17.7 U19.31
USBOTG_ID: Module1.101 U17.2
VBAT: Module1.76
VBUS_EN: Module1.111
WL_nDis: Module1.89
pads on no net: J1.Un1 J1.Un2 J4.Un1 J4.Un2 J5.MP J15.Un1 J15.Un2 J16.MP J17.Un1 J17.Un2 Module1.Un1 Module1.Un2 Module1.Un3 Module1.Un4 U3.Un1 U3.Un2 U19.Un1 U19.Un2 U19.Un3 U19.Un4 U19.Un5 U19.Un6 U19.Un7 U19.Un8 U19.Un9

## Keep-outs
Edge.Cuts:
  lines w0: 70,41.25 210,41.25 210,141.25 70,141.25 70,41.25
  lines w0.254: 70,41.25 210,41.25 210,141.25 70,141.25 70,41.25

## Text inside footprints (layer, text, board x,y; h text height)
J1: Dwgs.User "PCB Edge" at 177.585,41.813 h1
J4: F.SilkS "M.2 M Key" at 109.719,82.15 h1 r270; F.SilkS "2242" at 75.57,88.25 h1 r270; F.SilkS "2230" at 87.135,68.25 h1 r90; F.SilkS "2260" at 57.135,68.25 h1 r90; F.SilkS "2242" at 75.13,68.25 h1 r90; F.SilkS "2260" at 57.565,88.25 h1 r270; F.SilkS "2230" at 87.565,88 h1 r270; F.SilkS "2280" at 39.635,68.25 h1 r90; F.SilkS "2280" at 37.565,88.25 h1 r270
J15: Dwgs.User "PCB Edge" at 189.385,41.813 h1
J17: Dwgs.User "PCB Edge" at 200.785,41.813 h1